# Altium PCB PCBNotch.PcbDoc
Units mil, origin at the board's own origin, x right, y up, seen from the top; angles counter-clockwise.
Board outline 2080.03 x 845.03 mil, 2 copper layers (Top Layer, Bottom Layer); 8 components, 5 nets, 16 pads, 0 vias.
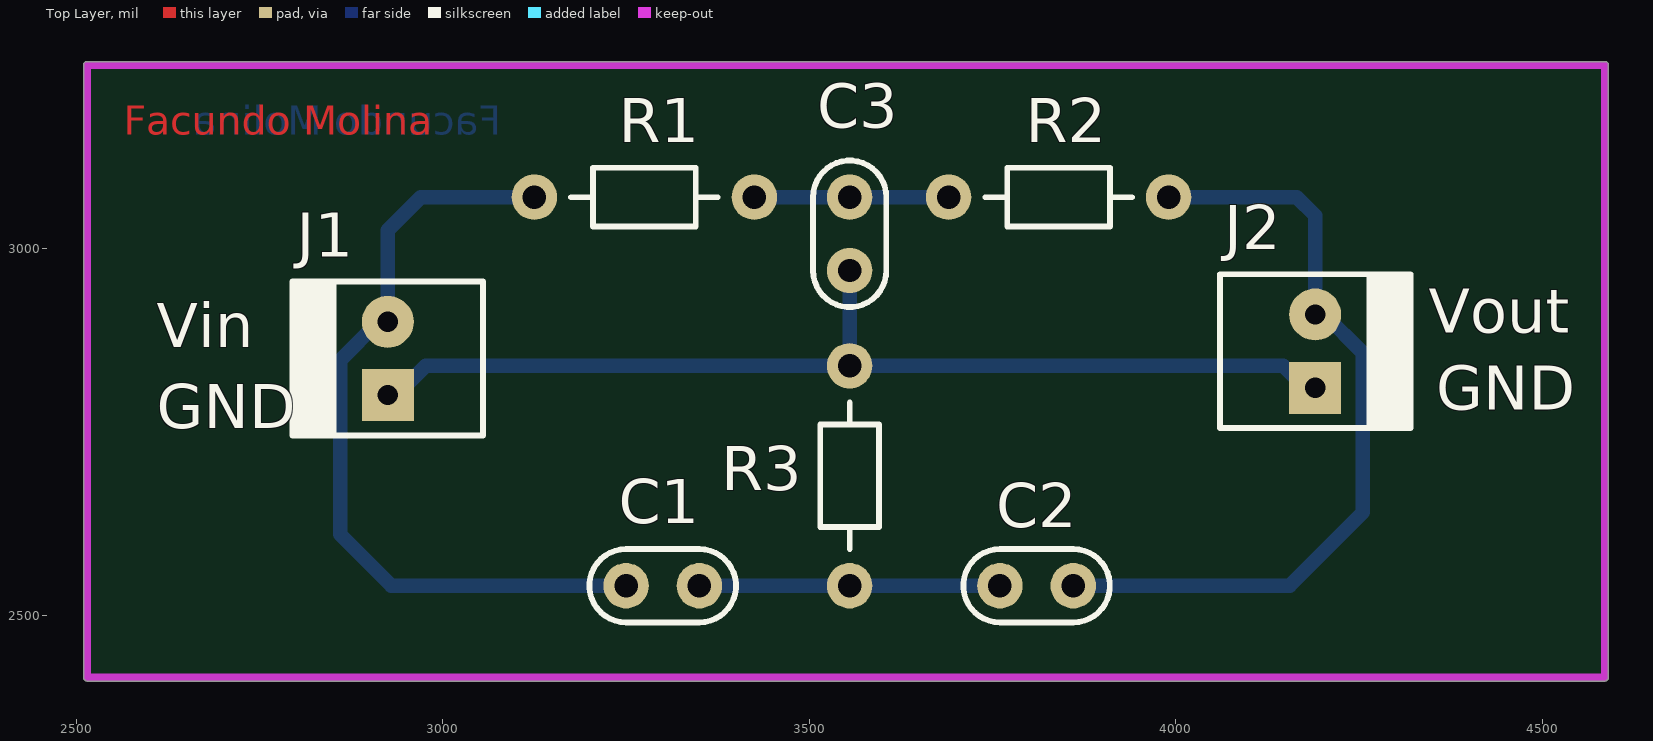
[diagram p0: Top Layer view]
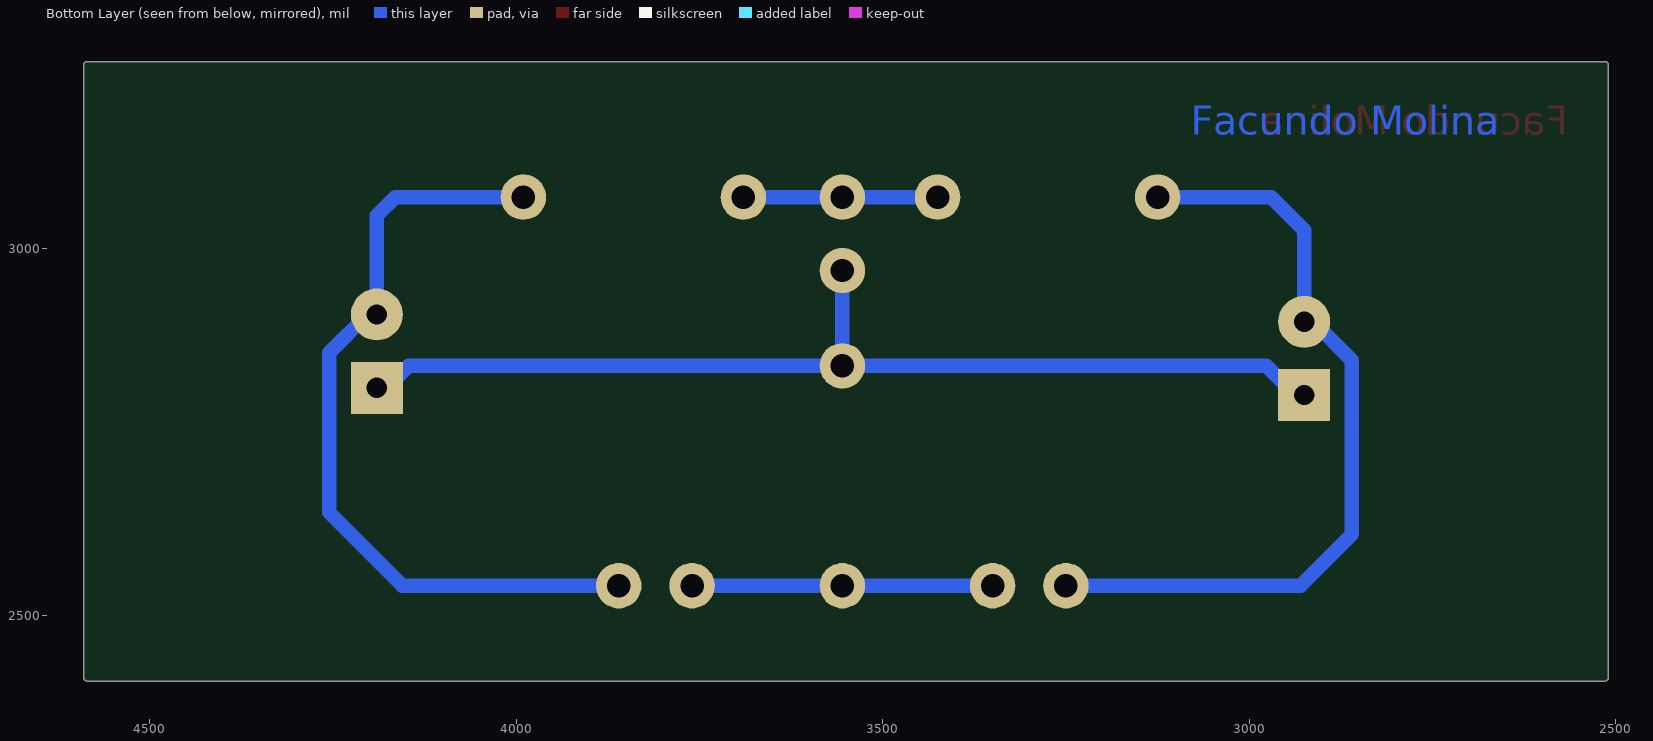
[diagram p1: Bottom Layer view, seen from below]
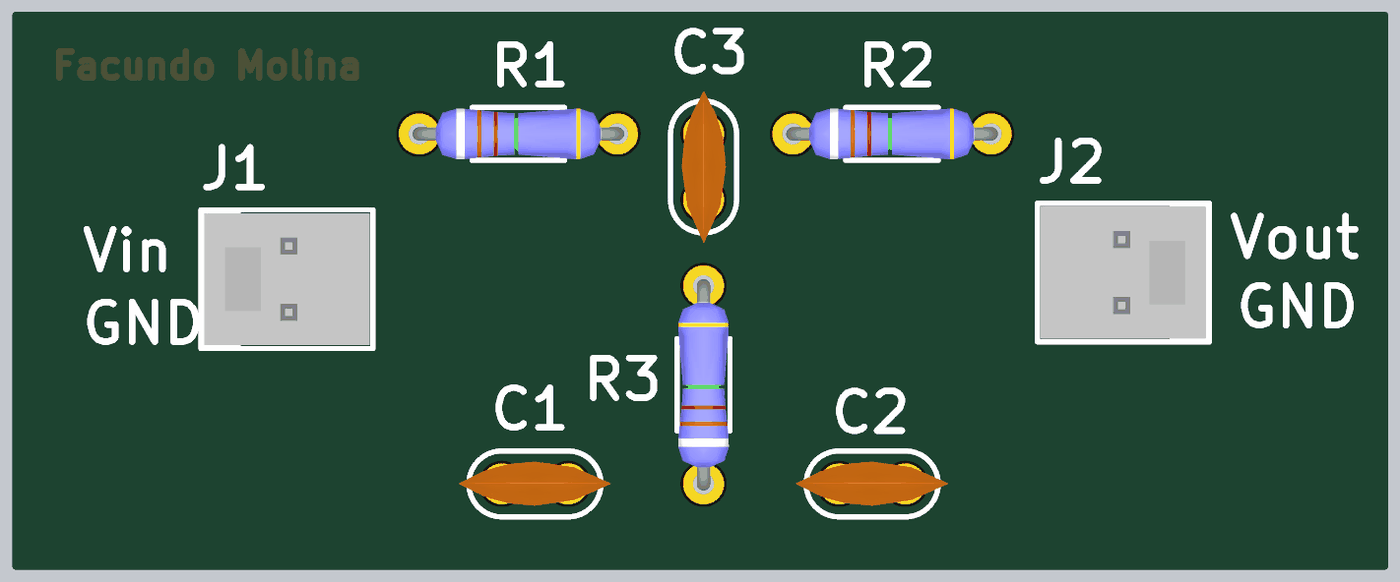
[diagram p2: 3D render of the assembled board from above, using the file's embedded part models]

## Layer stack, top to bottom
Top Solder: solder mask 0.4, Solder Resist, Dk 3.5
Top Layer: signal copper 1.4
Dielectric 1: dielectric 12.6, FR-4, Dk 4.8
Bottom Layer: signal copper 1.4
Bottom Solder: solder mask 0.4, Solder Resist, Dk 3.5

## Board outline
2509.99,2415 ccw(c2515,2415) 2515,2409.99 4585,2409.99 ccw(c4585,2415) 4590.02,2415 4590.02,3250 ccw(c4585,3250) 4585,3255.01 2515,3255.01 ccw(c2515,3250) 2509.99,3250

## Design rules (kind name [scope] priority, off if disabled: settings)
Clearance [All] p1: gap=19.68 ignorepadtopadclearanceinfootprint=FALSE
PolygonConnect [All] p1: connectstyle=Relief reliefconductorwidth=10 reliefentries=4 polygonreliefangle="90 Angle" airgapwidth=10
RoutingVias [All] p1: holewidth=27.56 width=70.87 viastyle="Through Hole" minholewidth=27.56 minwidth=70.87 maxholewidth=27.56 maxwidth=70.87
SolderMaskExpansion [All] p1: expansion=4 istentingtop=FALSE
Width [All] p1: maxlimit=19.68 minlimit=19.68 preferedwidth=19.68
30 further rules are at their usual default settings.

## Components (designator, comment, footprint, x,y, rotation, side; value= is the part's Value field where it differs from the comment)
C1 "18nF" CAP100 3300,2540 r0 top
C2 "18nF" CAP100 3810,2540 r0 top
C3 "39nF" CAP100 3555,3020 r270 top
J1 "INPUT" MOLEX2#1 2925,2800 r90 top
J2 "OUTPUT" MOLEX2#2 4190,2910 r270 top
R1 "3300" RES300 3125,3070 r0 top
R2 "3300" RES300 3690,3070 r0 top
R3 "RES" RES300 3555,2540 r90 top (schematic designator R?)

## Footprints (in the part's own frame and the unit in brackets; to place one, negate y for a bottom-side part, rotate by r counter-clockwise, add the part's x,y. Pads: shape width x height; smd on the part's side, far side on the other; paste and mask are expansions set on the pad)
CAP100 [mil]
  round 62 hole 32: 1(-50,0) 2(50,0)
  silkscreen extent -100,-50 100,50, body extent -115,-33 115,34, height 241
MOLEX2#1 [mm]
  rect 1.8x1.8 hole 0.7: 1(0,0)
  round 1.8 hole 0.7: 2(2.54,0)
  silkscreen extent -1.4,-3.3 3.94,3.3, body extent -1.27,-3.17 3.81,3.18, height 10.74
MOLEX2#2 [mm]
  round 1.8 hole 0.7: 1(0,0)
  rect 1.8x1.8 hole 0.7: 2(2.54,0)
  silkscreen extent -1.4,-3.3 3.94,3.3, body extent -1.27,-3.18 3.81,3.18, height 10.74
RES300 [mil]
  round 62 hole 32: 1(0,0) 2(300,0)
  silkscreen extent 50,-40 250,40, body extent -10,-38 310,38, height 79

## Part data
C1 C2 C3: library part CAP
J1 J2: library part MOLEX2
R1 R2: library part RES

## Nets (pads, with @x,y where several pads share a name; then routed paths per layer and width w, separated by ;. In a path a pad name is that pad's centre, name@x,y a point inside that pad or via, vN(x,y) a via of type N, cw(c..) or ccw(c..) an arc to the next point about the centre after c; other vN are vias at no path point)
GND: C3.2 J1.1 J2.2 R3.2 | length 1441.7
  Top Layer w10: J1.1 J1.1@2930,2805
  Bottom Layer w19.68: J1.1@2930,2805 J1.1 2936.87,2800 2976.87,2840 R3.2 ; C3.2 R3.2 ; J2.2@4187.5,2807.5 J2.2 4176.15,2810 4146.15,2840 R3.2
NetC1_1: C1.1 J1.2 R1.1 | length 1086.9
  Bottom Layer w19.68: R1.1 2970,3070 2925,3025 J1.2 2912.38,2900 2860.04,2847.66 2860.04,2609.96 2930,2540 C1.1
NetC1_2: C1.2 C2.1 R3.1 | length 410
  Bottom Layer w19.68: C1.2 R3.1 C2.1
NetC2_2: C2.2 J2.1 R2.2 | length 1086.1
  Bottom Layer w19.68: C2.2 4155,2540 4254.96,2639.96 4254.96,2857.66 4202.62,2910 J2.1 4190,3045 4165,3070 R2.2
NetC3_1: C3.1 R1.2 R2.1 | length 265
  Bottom Layer w19.68: R1.2 C3.1 R2.1

## Keep-outs
Top Layer:
  lines w10: 2515,2415 2515,3250 4585,3250 4585,2415 2515,2415

## Other copper
Top Layer:
  text "Facundo Molina" at 2565,3155 h39.37
Bottom Layer:
  text "Facundo Molina" at 3080,3155 h39.37

## Silkscreen, mask and mechanical layers (free items; w line width, h text height)
Top Overlay:
  text "Vout" at 4345,2885 h60
  text "Vin" at 2610,2865 h60
  text "GND" at 4355,2780 h60
  text "GND" at 2610,2755 h60